# Altium PCB JWB-001.PcbDoc (part 2 of 2)
Units mil, origin at the board's own origin, x right, y up, seen from the top; angles counter-clockwise.
Board outline 944.88 x 944.88 mil, 4 copper layers (Top, Layer 2, Layer 3, Bottom), stack 35.2 mil thick; 81 components, 68 nets, 347 pads, 153 vias.
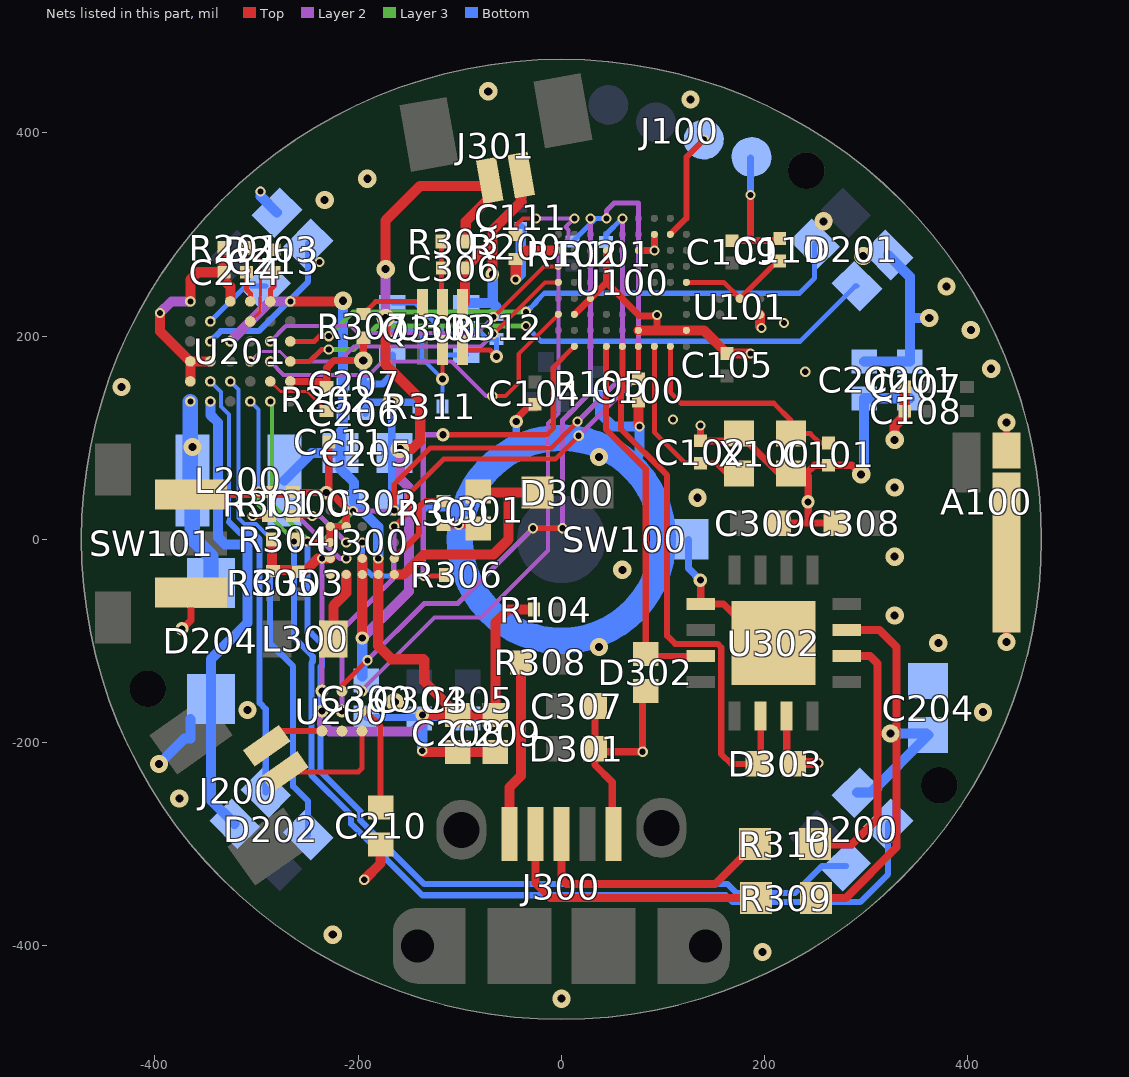
[diagram p4: the nets of this part, all layers, seen from the top]

## Via types
v1: diameter 10, hole 6, Top to Layer 2, tented top, 27 vias
v2: diameter 18, hole 8, Top to Bottom, 26 vias
v3: diameter 10, hole 6, Top to Bottom, 24 vias
v4: diameter 10, hole 6, Top to Bottom, tented both sides, 15 vias
v5: diameter 13, hole 7, Top to Bottom, tented top, 12 vias
v6: diameter 10, hole 6, Layer 3 to Bottom, tented bottom, 8 vias
v7: diameter 13, hole 7, Top to Layer 2, tented top, 7 vias
v8: diameter 18, hole 8, Top to Layer 2, 5 vias
v9: diameter 10, hole 6, Top to Layer 2, 5 vias
v10: diameter 18, hole 8, Top to Bottom, tented top, 5 vias
v11: diameter 10, hole 6, Top to Bottom, tented top, 4 vias
v12: diameter 10, hole 6, Layer 3 to Bottom, 3 vias
v13: diameter 18, hole 8, Layer 3 to Bottom, 3 vias
v14: diameter 10, hole 6, Layer 2 to Layer 3, 3 vias
v15: diameter 18, hole 8, Top to Layer 2, tented top, 2 vias
v16: diameter 28, hole 16, Top to Bottom, 1 vias
v17: diameter 10, hole 6, Top to Bottom, tented bottom, 1 vias
v18: diameter 10/10 (per signal layer), hole 6, Layer 3 to Bottom, tented bottom, 1 vias
v19: diameter 13, hole 7, Layer 3 to Bottom, 1 vias

## Nets (pads, with @x,y where several pads share a name; then routed paths per layer and width w, separated by ;. In a path a pad name is that pad's centre, name@x,y a point inside that pad or via, vN(x,y) a via of type N, cw(c..) or ccw(c..) an arc to the next point about the centre after c; other vN are vias at no path point) (continued)
GND: A100.2 A100.3 C100.2 C101.2 C102.2 C104.2 C105.2 C107.2 C108.2 C109.2 C110.2 C111.2 C200.2 C201.2 C204.2 C205.2 C206.2 C207.2 C208.2 C209.2 C210.2 C211.2 C213.2 C214.1 C300.2 C301.2 C302.2 C304.2 C305.2 C307.2 C308.2 C309.2 D301.2 D302.1 D303.2 J100.4 J300.5 Q300.1 R105.1 R200.1 R201.1 R202.1 R300.1 R301.1 R304.1 R307.1 R311.1 RT300.2 SW100.2 SW101.1 U100.B1 U100.B4 U100.C8 U100.D7 U100.G3 U100.G4 U100.G6 U100.G9 U100.H3 U101.B1 U200.B3 U201.A5 U201.D1 U201.E4 U201.F1 U201.F4 U201.F5 U300.A2 U300.B1 U300.B2 U300.C1 U300.E1 U302.3 U302.13 U302.17 X100.2 X100.4 | length 3053
  Top w7: v5@-373,-88 -364.57,-79.57 SW101.1@-364.57,-52.23 ; SW101.1@-364.57,44.23 -266.58,44.23 -264.81,46 v5(-231.41,46) v5@-231,46 ; U201.A5@-266.79,155.47 R202.1@-236.66,155.47 ; R304.1@-258.19,-3 U300.C1@-227.5,-3 U300.B1@-227.5,12.75 U300.B2@-211.75,12.75 U300.A2@-211.75,28.5 -211.75,30.7 -229.02,47.98 C211.2@-229.02,96 ; R202.1@-231,149.81 -231,169 -224,176 v10(-195,176) R307.1@-195,198.19 ; R300.1@-116,14.19 C301.2@-85.3,14.19 ; v5@-44,116 -44,119 -30.02,132.98 C104.2@-26,132.98 ; U100.C8@12.76,221.5 U100.D7@28.5,237.25 44.25,253 ; D301.2@33.11,-209 33.11,-222.11 50,-239 J300.5@50,-288.56 ; D301.2@33.11,-206 33.11,-170 C307.2@36.11,-167 ; D301.2@36.11,-209 v3(80,-209) 80,-152.11 D302.1@83,-149.11 ; U100.G6@44.25,284.5 44.25,253 ; U100.G4@75.75,284.5 v4(91.5,284.5) U100.H3@91.5,300.24 ; 94,205.76 v11@94,220 ; v11(94,221) v11@94,220 ; v3(137,112) C102.2@137,97.02 X100.2@167.7,97.02 ; v5@137.15,-40.15 U302.13@137.15,-63.61 159.61,-63.61 198,-102 U302.17@209,-102 ; C109.2@168,294.02 186,294.02 ; X100.2@174.78,104.09 X100.4@214.15,64.72 ; v3(186,339) 186,294.02 ; C110.2@213,294.02 186,294.02 ; C309.2@214.11,16 243,16 ; U302.3@221.8,-173.85 221.8,-213.68 D303.2@229.11,-221 ; X100.4@225.96,64.72 240.72,64.72 248.98,72.98 C101.2@263,72.98 286.02,72.98 v2(295,64) ; 243,62.45 243,16 ; C308.2@269.89,16 243,16 ; v2(438,-101) 438.29,-100.71 A100.2@438.29,-13.11 ; A100.3@438,87.57 v2(438,115) ; 44.25,253 44.25,252.75 77,220 v11@94,220
  Top w10: v3(-395,223) -395,204.94 U201.F4@-365.21,175.16 ; U201.F5@-365.21,155.47 U201.F4@-365.21,175.16 ; v9(-365.21,234.21) -365.21,255.79 -358,263 C214.1@-332.02,263 ; U201.E4@-345.53,175.16 U201.F4@-365.21,175.16 ; R201.1@-332.02,286.4 C214.1@-332.02,263 ; U201.D1@-325.84,234.21 -325.84,248.84 -332.02,255.02 C214.1@-332.02,263 ; v3(-194,-335) -178,-319 C210.2@-178,-300.11 ; v3(-137,-208) -135.89,-209.11 C208.2@-102,-209.11 C209.2@-65,-209.11 ; v3(-45,255.81) -45,274 -34.5,284.5 U100.G9@-2.99,284.5 ; U100.B4@75.75,205.76 94,205.76 U100.B1@122.99,205.76 140.24,205.76 C105.2@163,183 v3(186,183) ; v3@76,112 C100.2@76,135.98 ; v3@195.37,209.63 U101.B1@195.37,221.25 ; D303.2@230.11,-220 v17(253,-220) ; v2(328,98) 328,112 337.98,121.98 C108.2@337.98,126.19 C107.2@337.98,150.19
  Layer 2 w10: v3(-395,223) -383.79,234.21 v9(-365.21,234.21)
  Bottom w7: C207.2@-195,155 v10(-195,176) ; C206.2@-192.98,124 C207.2@-193,153 -176,153 -166.42,162.58 Q300.1@-166.42,181.41 ; C300.2@-192,-175.11 C305.2@-93,-175.11 ; -190.98,135 v10(-167,135) ; R311.1@-140.81,131 -144.81,135 v10(-167,135) ; -95.06,31.04 -162.93,31.04 C302.2@-167.89,36 -167,36.89 v10(-167,135) ; -44.41,91.97 v5(-44.41,116) ; SW100.2@125,0 125,-28.41 v5(136.74,-40.15) ; v3(186,339) J100.4@186,375.23
  Bottom w10: v3(-137,-208) C304.2@-137,-179.11 ; v3(-45,255.81) -39.99,260.82 C111.2@-39.99,306.22 ; R105.1@38,141.19 38,124 51,111 v3(77,111) 77,84.43 66.9,74.33 ; v2(295,64) 298,67 C200.2@298,138.89 C201.2@343,138.89
  other v2: 0,-452 198,-406 -225,-389 -376,-255 415,-170 -164,-160 37,-106 371,-102 328,-75 60,-30 328,-17 134,41 328,51 37,81 -433,150 423,168 403,206 379,249 -233,334 -191,355 127,433 -72,441
  other v3: 110,118 240,165 197,208 219,213
  other v5: -373.41,-88 242.59,37
  other v8: -309,-168 -363,91 297,279 258,313
  other v9: -101,14.19 -238,273
GREEN1: D200.3 U201.B6 | length 964.5
  Layer 3 w4: v4@-285,134.31 -285,35 -250,0 v6(-250,-2)
  Bottom w6: -250,-92.27 v6(-250,-2) ; -246,-92.27 -235.76,-102.51 -235.76,-123.94 -237,-125.18 -237,-228.54 -198,-267.54 -198,-276.27 -134.91,-339.36 163.64,-339.36 172.27,-348 230,-348 256.38,-321.62 D200.3@279.87,-321.62
  other v4: -286.47,135.79
GREEN2: D201.3 U201.A3 | length 576.1
  Top w5: U201.A3@-266.79,194.84 -243.16,194.84 -238,200 v4(-229,200)
  Layer 3 w5: v4(-229,200) -205,224 v6(-35,224)
  Bottom w5: v6(-35,224) -31.5,227.5 -30.65,227.5 -24.5,233.65 -24.5,234.5 -16.76,242.24 234.24,242.24 249.24,257.24 D201.3@249.24,291
GREEN3: D202.3 U201.D5 | length 484.8
  Bottom w4: v4(-325.84,155.47) -318,147.63 -318,21 -312,15 -300.69,15 -287,1.31 -287,0
  Bottom w6: -287,0 -287,-102 -264,-125 -264,-243 -249.24,-257.76 D202.3@-249.24,-291
GREEN4: D203.3 U201.E2 | length 68.9
  Bottom w5: v3(-345.53,214.53) -310.81,249.24 D203.3@-291,249.24
HAP_EN: R200.2 U100.J8 U200.A1 | length 649.7
  Top w4: R200.2@-44,300.81 -44,310 -38.01,315.99 v1(-25,315.99)
  Layer 2 w4: v1(-196.31,-149.31) -196.31,-148.31 -125,-77 -79,-77 -13,-11 -13,114 -3,124 -3,286.09 7.01,296.1 7.01,304.39 4.08,307.31 v1(12.76,315.99) v1(-25,315.99)
HAP_TRIG: U100.J7 U200.B1 | length 597.6
  Top w5: U200.B1@-216,-144 v1(-191,-119) ; v1(-28,11) v1(1,11)
  Layer 2 w5: v1(-191,-119) -135,-63 -102,-63 v1(-28,11) ; v1(1,11) 1,117 28.5,144.5 v1(28.5,315.99)
LRA+: J200.1 U200.A3 | length 113.8
  Top w5: J200.1@-271.97,-228.9 -199.9,-228.9 -196.31,-225.31 U200.A3@-196.31,-188.68
LRA-: J200.2 U200.C3 | length 60.3
  Top w6: J200.2@-290.03,-203.1 -275.62,-188.68 U200.C3@-235.68,-188.68
NetC100_1: C100.1 U100.A4 | length 31.7
  Top w5: C100.1@76,158.02 U100.A4@76,189.76
NetC101_1: C101.1 U100.A2 X100.1 | length 229.2
  Top w5: U100.A2@107.24,190.01 107.24,144.76 118,134 209,134 225.96,117.04 X100.1@225.96,104.09 244.91,104.09 253.98,95.02 C101.1@263,95.02
NetC102_1: C102.1 U100.A3 X100.3 | length 172.2
  Top w5: U100.A3@91.5,190.01 91.5,105.5 122.02,74.98 C102.1@137,74.98 152.02,74.98 X100.3@162.28,64.72
NetC110_1: C110.1 U100.E1 U101.A2 | length 111.6
  Top w5: U100.E1@122.99,253 159.68,253 U101.A2@175.68,237 C110.1@212.66,273.98
NetC210_1: C210.1 U200.A2 | length 104.4
  Top w6: U200.A2@-196.31,-169 -193,-169 -178,-184 C210.1@-178,-263.89
NetC213_1: C213.1 U201.B1 | length 30.2
  Top w5: U201.B1@-286.47,234.21 -286.47,245.53 -283,249 C213.1@-283,262.95
NetC214_2: C214.2 U201.C1 | length 30.4
  Top w5: C214.2@-309.98,263 -309.98,245.98 -306.16,242.16 U201.C1@-306.16,234.21
NetC301_1: C301.1 D300.C U300.E5 | length 230.1
  Top w10: U300.E5@-164.5,-34.5 -155.25,-34.5 -135.76,-15 -67,-15 -52.21,-0.21 -52.21,46 ; C301.1@-80.89,46 -52.21,46 ; D300.C@-23.53,46 -52.21,46
NetC303_2: C303.2 R304.2 R305.1 U300.D1 | length 92.2
  Top w10: R304.2@-284.81,0 -284.81,-30.19 -251.19,-30.19 -239.75,-18.75 U300.D1@-227.5,-18.75
NetC306_1: C306.1 R303.1 U301.5 | length 60.6
  Top w5: U301.5@-117.81,232.45 R303.1@-117.81,293
NetD204_A: D204.A L200.2 U201.F6 | length 184.3
  Bottom w15: L200.2@-365.21,59.94 v4(-365.21,135.79) ; L200.2@-363.28,58 -363.28,1.28 -345,-17 D204.A@-345,-42.91
NetJ100_3: J100.3 U100.H2 | length 106.8
  Top w6: U100.H2@107.24,300.24 123,316 123,376.31 v3(140.14,393.45)
NetJ300_1: J300.1 R308.1 | length 173.5
  Top w10: J300.1@-51.18,-289.74 -51.18,-244.18 -39.7,-232.7 R308.1@-39.7,-121
NetJ300_2: J300.2 R309.1 | length 271.8
  Top w8: J300.2@-25.59,-289.74 -25.59,-338.41 -11,-353 R309.1@191.47,-353
NetJ300_3: J300.3 R310.1 | length 253
  Top w8: J300.3@0,-289.74 0,-334 5,-339 151.47,-339 R310.1@190.47,-300
NetL300_1: L300.1 U300.E2 | length 68.8
  Top w10: L300.1@-224.44,-98 -224.44,-65.44 -211.75,-52.75 U300.E2@-211.75,-34.5
NetQ300_2: Q300.2 R311.2 U301.2 | length 138.4
  Top w4: v5(-117,158) U301.2@-117,186.36
  Bottom w4: Q300.2@-166.42,207 -143,207 -137,201 -137,178 v5(-117,158) R311.2@-117,131.19
NetQ300_3: Q300.3 Q300.6 | length 106.3
  Bottom w5: Q300.3@-166.42,232.59 -143.59,232.59 -118,207 -118,186 -113.41,181.41 Q300.6@-93.58,181.41
NetQ300_5: Q300.5 R312.2 U301.3 | length 86.8
  Top w5: U301.3@-97.32,186.36 -70.36,186.36 v5(-64,180)
  Bottom w5: Q300.5@-93.58,207 -83,207 -73.19,197.19 R312.2@-64,197.19 v5(-64,180)
NetR201_2: R201.2 U201.C2 | length 81.9
  Top w3: R201.2@-309,287 -296,274 -296,253 -296.5,224.69 -296.5,224.19 U201.C2@-306.16,214.53
NetR202_2: R202.2 U201.B5 | length 67.6
  Top w3: U201.B5@-286.47,155.47 -276.5,145.5 -250.31,145.5 R202.2@-231,126.19
NetR300_2: R300.2 U300.D5 | length 87.3
  Top w6: U300.D5@-164.5,-18.75 -140,5.76 -140,32 -134.19,37.81 R300.2@-116,37.81
NetR301_2: R301.2 U300.D2 | length 125.2
  Top w5: v1(-303.81,23.19) R301.2@-288,23.19
  Layer 2 w5: v1(-303.81,23.19) -260.04,23.19 -218.1,-18.75 v1(-211.75,-18.75)
NetR307_2: R307.2 U301.6 | length 64.3
  Top w5: R307.2@-195,221.81 -182.81,234 -139.05,234 U301.6@-136.69,231.64
NetR309_2: R309.2 U302.7 | length 353.3
  Top w8: R309.2@250.53,-353 280,-353 330,-303 330,-106 313.2,-89.2 U302.7@280.85,-89.2
NetR310_2: R310.2 U302.6 | length 258
  Top w8: R310.2@249.53,-300 286,-300 311,-275 311,-122 303.8,-114.8 U302.6@280.85,-114.8
NetRT300_1: RT300.1 U300.C2 | length 63.1
  Top w5: RT300.1@-264,23.19 v1(-245.19,23.19)
  Layer 2 w5: v1(-245.19,23.19) -237.94,23.19 v1(-211.75,-3)
PMIC_INT: R306.1 U100.A8 U300.C3 | length 465
  Top w5: v11(-135,-36) R306.1@-115.81,-36 ; v7@-116,103 -14,103 -8,109 -8,169.25 U100.A8@12.76,190.01
  Layer 2 w5: v11@-136,-35 -136,103 v7(-116.41,103)
  Bottom w5: v11(-196,-3) -196,-26 -186,-36 v11(-135,-36)
RED1: D200.4 U201.C6 | length 1079.4
  Layer 3 w4: v6(-298,47) -298,34 -272,8 -271.86,8 -263,-0.86 v6(-263,-2)
  Bottom w4: v4(-306.16,135.79) -298,127.63 v6(-298,47)
  Bottom w6: v6(-263,-2) -263,-97 -244.76,-115.24 -244.76,-120.21 -246,-121.46 -246,-232.27 -207,-271.27 -207,-280 -136.77,-350.23 161.77,-350.23 168.54,-357 294,-357 321.62,-329.38 D200.4@321.62,-279.86
RED2: D201.4 U201.A4 | length 600.9
  Top w5: U201.A4@-266.79,175.16 -247.84,175.16 -236,187 v4(-229,187)
  Layer 3 w5: v4(-229,187) -204.51,187 -181.51,210 v18(-35,210)
  Bottom w5: v18(-35,210) -20,195 235,195 289.24,249.24 D201.4@291,249.24
RED3: D202.4 U201.E5 | length 434.9
  Bottom w4: v4(-345.53,155.47) -335,144.94 -335,131 -327,123 -327,17
  Bottom w6: -327,17 -316,6 -303,6 -297,0 -297,-161 -291,-167 D202.4@-291,-249.24
RED4: D203.4 U201.E3 | length 157.9
  Bottom w6: v3(-345.53,194.84) -335.37,205 -298,205 -249.24,253.76 D203.4@-249.24,291
SCL: R101.1 U100.J5 U200.C1 U300.A5 | length 710
  Top w5: v1(-164.5,28.5) -164.5,54.5 -129,90 -10,90 v1(16,116)
  Layer 2 w5: v7(-235.68,-149.31) v14(-235.68,-18.68) ; v14(-205,28) v1@-165,28 ; v1(16,116) 60,160 v4(60,315.99)
  Layer 3 w5: v14(-235.68,-18.68) -235.68,-2.68 v14(-205,28)
  Bottom w5: R101.1@44,292.81 44,299.99 v4(60,315.99)
SCLK: U100.F9 U201.B3 | length 319.9
  Top w4: v1(-67,219) -17.25,268.75 U100.F9@-2.99,268.75
  Layer 2 w4: v1(-286.47,194.84) -271.31,210 -207,210 -200,203 -83,203 v1(-67,219)
SDA: R102.1 U100.J6 U200.B2 U300.B5 | length 770.2
  Top w5: v1(-164.5,12.75) -150,27.25 -150,45 -116,79 -6,79 v1(17,102)
  Layer 2 w5: v7(-216,-169) -216,-89 -165,-38 v1@-165,12.75 ; v1(17,102) 76,161 76,331 52,331 44.25,323.25 v4(44.25,315.99)
  Bottom w5: R102.1@11,293 33.99,315.99 v4(44.25,315.99)
SDI: U100.C9 U201.B4 | length 358.4
  Top w4: v1(-68,141) -55,141 -42,154 -42,182.5 U100.C9@-2.99,221.5
  Layer 2 w4: v1(-286.47,175.16) -273.31,162 -189.2,162 -176.2,175 -108,175 -74,141 v1(-68,141)
SDO: U100.E9 U201.C4 | length 343.7
  Top w4: v1(-67,202) -16,253 U100.E9@-2.99,253
  Layer 2 w3: v1(-306.16,175.16) -296.32,185 -277,185 -267,175
  Layer 2 w4: -267,175 -219,175 -204,190 -79,190 v1(-67,202)
USB_UART_RX: D303.1 U100.A5 U302.2 | length 548.9
  Top w6: 58.85,145.85 58.85,108.15 104,63 104,-95 111.89,-102.89 153.81,-102.89 157.32,-106.4 157.32,-211.32 167,-221 D303.1@192.89,-221 ; 60,147 U100.A5@60,190.01 ; D303.1@196.2,-217.69 U302.2@196.2,-173.85
USB_UART_TX: D302.2 U100.A6 U302.15 | length 371
  Top w6: U100.A6@44,189.76 44,108 83,69 D302.2@83,-112.89 ; D302.2@84.91,-114.8 U302.15@137.15,-114.8
VB-: C306.2 J301.2 Q300.4 R312.1 U301.4 | length 240.2
  Top w10: U301.4@-94.98,233.98 C306.2@-94.98,267 -67.79,294.19 ; v5@-67.79,261.21 -67.79,294.19 ; J301.2@-39.49,358.73 -39.49,332.51 -67.79,304.21 -67.79,294.19
  Bottom w10: Q300.4@-93.58,232.59 -67.59,232.59 ; v5@-67.59,261 -67.59,232.59 ; -64,229 -67.59,232.59
  other v5: -68,261
VBATT: C300.1 J301.1 R303.2 U300.D3 U300.E3 | length 755.3
  Top w10: v5(-196,-97) U300.E3@-196,-34.5 U300.D3@-196,-18.75 ; v15(-173,218) -173,172 -139,138 -139,97 -147,89 v8(-159,89) ; v15(-173,266) -173,314 -139.08,347.92 J301.1@-75.85,347.92 ; R303.2@-94.19,293 -94.19,312.81 -70.51,336.49 J301.1@-70.51,347.92
  Layer 2 w10: v5(-196,-97) -150,-51 -150,51 -159,60 v8(-159,89) ; v15(-173,218) v15(-173,266)
  Bottom w10: C300.1@-196,-134.89 v5(-196,-97)
VLED: C200.1 C201.1 C204.1 D200.1 D201.1 D202.1 D203.1 D204.C U201.E6 | length 863
  Bottom w10: v13(-396,-221) -371,-196 -365,-196 D204.C@-365,-177.09 ; v4(-345.53,135.79) -345.53,122.53 -338,115 -338,2 -331,-5 -309,-5 -309,-82 -345,-118 D204.C@-345,-157.09 -345,-256.49 D202.1@-321.62,-279.87 ; v12(-296,342.5) -296,337.76 D203.1@-279.87,321.62 ; D200.1@291,-249.24 304.33,-249.24 C204.1@361,-192.57 ; C200.1@298,175.11 C201.1@343,175.11 343,217 ; D201.1@321.62,279.87 343,258.49 343,217 ; v13(324,-191) C204.1@359.43,-191 ; v13(362,218) 344,218 343,217
VSYS: C205.1 C206.1 C207.1 C208.1 C209.1 C302.1 L200.1 R104.2 U200.C2 U201.A1 U201.D3 U300.D4 U300.E4 | length 998.9
  Top w10: v9(-266.79,234.21) v10@-215.79,234.21 ; v11(-180.25,-18.75) U300.E4@-180.25,-34.5 -180.25,-104.75 -167,-118 -136,-118 -135,-119 -135,-140 -134.95,-139.95 C208.1@-102,-172.89 ; v7(-136.89,-172.89) C208.1@-102,-172.89 ; R104.2@-27,-69 -52,-69 -65,-82 C209.1@-65,-172.89 C208.1@-102,-172.89
  Layer 2 w10: v9(-325.84,194.84) -286.47,234.21 v9(-266.79,234.21) ; v7(-235.68,-169) -235.68,-181.32 -228,-189 -146,-189 -136.89,-179.89 v7(-136.89,-172.89)
  Bottom w10: L200.1@-272.72,58 -245.72,85 C205.1@-217.57,85 ; C207.1@-215.05,153 v10(-215.05,234.95) ; C207.1@-215.05,153 -215,108 -217.57,105.43 C205.1@-217.57,85 ; v11(-180.25,-18.75) -180.25,12.14 C302.1@-204.11,36 -204.11,56.11 -217.57,69.57 C205.1@-217.57,85
pads on no net: J200.0 J300.4 J300.6 J301.0 SW101.0 U100.B5 U100.B6 U100.B7 U100.B9 U100.C5 U100.C6 U100.C7 U100.D8 U100.E2 U100.E3 U100.E7 U100.E8 U100.F2 U100.F3 U100.F7 U100.F8 U100.G1 U100.G2 U100.G5 U100.G7 U100.G8 U100.H1 U100.H4 U100.H5 U100.H6 U100.H7 U100.J3 U100.J4 U201.D2 U201.D4 U201.F2 U300.A1 U300.A3 U300.A4 U300.B3 U300.B4 U300.C5 U301.1 U302.4 U302.5 U302.11 U302.12 U302.14 U302.16

## Polygon pours and split planes (outlines as drawn)
VLED on Layer 3 "L3-VLED" (solid, remove dead copper, pour order 12): 363,-4.22 363,235 349,249 201,397 -42,397 -43,398 -219,398 -220,398 -330,288 -367.53,250.47 -399.8,155.64 -383.25,28.51 -399.96,-186.04 -346,-240 -265.85,-320.15 -161.28,-351.38 -159.66,-351.04 139.09,-350.96 202,-364 353.56,-98 460,-98 485.37,82.37 460,124.01 404.56,257.86 287.6,374.81 281.3,381.11 239.63,408.96 132.42,453.36 38.73,472 -49.45,472 -108.86,460.56 -250.88,403.76 -337.88,320.93 -379.83,269.82 -414.75,217.56 -430,180.74 -454.16,122.41 -458.4,79.4 -456.78,77.78 -456.78,-122.39 -456.78,-205.64 -374.81,-287.6 -195.42,-467 23.63,-467 158,-467 275,-417 574,-118 512,-56 512,55.73 480.35,130.33
1V8 on Layer 3 "L3-1V8" (solid, remove dead copper, pour order 14): 363,108.54 363,230.78 363,234 253,344 201,396 201,397 -219,397 -220,398 -357.99,260.01 -364.7,260.01 -364.7,190.74 -399.8,155.64 -398.86,154.7 -398.86,-171.88 -398.86,-187.14 -265.85,-320.15 -244.67,-341.33 -194.94,-341.33 -169.37,-341.33 -159.66,-351.04 -159.32,-351.38 141.11,-351.38 206.62,-351.38 211,-347 353.56,-204.44 353.56,-98
GND on Layer 2 "L3-GND" (solid, remove dead copper, pour order 18): 461,107 415,218.05 415,262 414,262 254,422 191,485 -17,485 -232,485 -383,334 -485,232 -485,-249 -485,-251 -348,-388 -347,-388 -272,-463 -257,-478 281,-478 281,-455 511,-225 498,-212 498,137 498,150 415,233
GND on Top "Top-GND" (solid, remove dead copper, pour order 20): -540,512 -537,509 506,509 506,-520 510,-524 508,-522 -547,-522
GND on Bottom "Bottom-GND" (solid, remove dead copper, pour order 22): -551,528 565,528 599,494 584,479 584,-503 -548,-503 -551,-506

## Keep-outs
Keep-Out Layer:
  circle w3.94: c0,0 r472.44

## Silkscreen, mask and mechanical layers (free items; w line width, h text height)
Bottom Overlay:
  drawing of 659 lines, arcs and shapes, not listed
  text "v3.7" at 305,-92 h15
Board Outline:
  circle w3.94: c0,0 r472.44
TitleBlock_Top:
  lines w5: -2765,-840 -2565,-840 ; -2765,1285 -2565,1285 ; -2765,3410 -2565,3410 ; -2565,-1565 -2565,-2765 ; -15,-2965 -15,-2765 ; -15,5335 -15,5535 ; 2735,-2965 2735,-2765 ; 2735,5335 2735,5535 ; 3335,-2765 1935,-2765 -2565,-2765 ; 3535,-2465 8035,-2465 ; 3535,-2165 8035,-2165 ; 3535,-1865 5035,-1865 ; 5035,-2765 5035,-2165 5035,-1565 ; 5485,-2965 5485,-2765 ; 5485,5335 5485,5535 ; 7135,-2765 7135,-2165 ; 8035,-840 8235,-840 ; 8035,1285 8235,1285 ; 8035,3410 8235,3410 ; -2565,-2765 8035,-2765 ; -2565,-2765 -2565,5335 8035,5335 8035,-2765 ; 3535,-2765 3535,-1565 ; 3535,-2765 8035,-2765 ; 3535,-2765 2135,-2765 2135,-1565 3535,-1565 ; 3535,-1565 5035,-1565 ; 5035,-1565 8035,-1565 8035,-2765 ; -2765,-2965 -2765,5535 8235,5535 8235,-2965 -2765,-2965
  text "1" at -1413.66,5400 h70
  text "2" at 1337,5400 h70
  text "3" at 4082,5400 h70
  text "4" at 6833.01,5400 h70
  text "A" at -2690,4382 h70
  text "A" at 8110,4382 h70
  text "B" at -2690,2257 h70
  text "B" at 8110,2257 h70
  text "C" at -2690,132 h70
  text "C" at 8110,132 h70
  text "ENGINEER:" at 3585,-1665 h45
  text "TITLE:" at 5085,-1665 h45
  text ".Engineer" at 3985,-1775 h100
  text "PCB DESIGNER:" at 3585,-1960 h45
  text "D" at -2690,-1988 h70
  text "D" at 8110,-1988 h70
  text ".Engineer" at 4010,-2100 h100
  text "DATE:" at 3585,-2265 h45
  text "PART NO.:" at 5085,-2265 h45
  text "REV:" at 7185,-2265 h45
  text ".Company" at 2287,-2371 h70
  text ".PRINT_DATE" at 3635,-2385 h70
  text ".Address1" at 2287,-2471 h70
  text ".Address2" at 2290,-2563 h70
  text "FILE NAME:" at 3585,-2565 h45
  text "DWG NO:" at 5085,-2565 h45
  text "SCALE:" at 7185,-2565 h45
  text ".Address3" at 2285,-2665 h70
  text ".PCB_FILE_NAME_NO_PATH" at 3635,-2685 h70
  text "1" at -1413.66,-2900 h70
  text "2" at 1337,-2900 h70
  text "3" at 4082,-2900 h70
  text "4" at 6833.01,-2900 h70
Drill Drawing:
  drawing of 391 lines, arcs and shapes, not listed
  text "NOTES: UNLESS OTHERWISE SPECIFIED" at 4120,4805 h60
  text "1. MATERIAL: COPPER CLAD PLASTIC SHEET PER IPC-4101" at 4120,4645 h60
  text "ROHS COMPLIANT TG 170 FR-4" at 4280,4525 h60
  text "TYPE GFN FINISHED COPPER WEIGHT TO BE: 1 OZ." at 4280,4405 h60
  text "OVERALL BOARD THICKNESS TO BE .036+/-.005." at 4280,4285 h60
  text "2. UNLESS OTHERWISE SPECIFIED ALL HOLE DIMENSIONS" at 4120,4165 h60
  text "Symbol" at -2263.78,4070 h72
  text "Count" at -1757.9,4070 h72
  text "Hole Size" at -1218.04,4070 h72
  text "Plated" at -118.36,4070 h72
  text "Hole Type" at 387.52,4070 h72
  text "Hole Length" at 1121.32,4070 h72
  text "Routed Path Length" at 2211,4070 h72
  text "APPLY AFTER PLATING." at 4300,4025 h60
  text "1" at -1757.9,3920 h60
  text "16.00mil (0.406mm)" at -1218.04,3920 h60
  text "PTH" at -118.36,3920 h60
  text "Round" at 387.52,3920 h60
  text "-" at 1121.32,3920 h60
  text "-" at 2211,3920 h60
  text "3. ALL HOLES SHALL BE LOCATED WITHIN 0.003 DIAMETER OF" at 4120,3845 h60
  text "2" at -1757.9,3770 h60
  text "32.48mil (0.825mm)" at -1218.04,3770 h60
  text "PTH" at -118.36,3770 h60
  text "Slot" at 387.52,3770 h60
  text "59.06mil (1.500mm)" at 1121.32,3770 h60
  text "26.57mil (0.675mm)" at 2211,3770 h60
  text "TRUE POSITION.  LAYER TO LAYER REGISTRATION SHALL BE" at 4280,3725 h60
  text "2" at -1757.9,3620 h60
  text "35.43mil (0.900mm)" at -1218.04,3620 h60
  text "PTH" at -118.36,3620 h60
  text "Slot" at 387.52,3620 h60
  text "39.37mil (1.000mm)" at 1121.32,3620 h60
  text "3.94mil (0.100mm)" at 2211,3620 h60
  text "WITHIN 0.003.  ADD TEARDROPS AS REQUIRED SO THAT ALL" at 4280,3605 h60
  text "HOLES SURROUNDED BY LAND SHALL HAVE A MINIMUM ANNULAR" at 4280,3485 h60
  text "3" at -1757.9,3470 h60
  text "35.98mil (0.914mm)" at -1218.04,3470 h60
  text "NPTH" at -118.36,3470 h60
  text "Round" at 387.52,3470 h60
  text "-" at 1121.32,3470 h60
  text "-" at 2211,3470 h60
  text "RING OF 0.002." at 4280,3365 h60
  text "12" at -1757.9,3320 h60
  text "7.00mil (0.178mm)" at -1218.04,3320 h60
  text "PTH" at -118.36,3320 h60
  text "Round" at 387.52,3320 h60
  text "-" at 1121.32,3320 h60
  text "-" at 2211,3320 h60
  text "4. CONDUCTOR WIDTHS AND SPACING SHALL BE WITHIN +/- 20%" at 4120,3185 h60
  text "31" at -1757.9,3170 h60
  text "8.00mil (0.203mm)" at -1218.04,3170 h60
  text "PTH" at -118.36,3170 h60
  text "Round" at 387.52,3170 h60
  text "-" at 1121.32,3170 h60
  text "-" at 2211,3170 h60
  text "OF ARTWORK ORIGINALS." at 4280,3065 h60
  text "44" at -1757.9,3020 h60
  text "6.00mil (0.152mm)" at -1218.04,3020 h60
  text "PTH" at -118.36,3020 h60
  text "Round" at 387.52,3020 h60
  text "-" at 1121.32,3020 h60
  text "-" at 2211,3020 h60
  text "5. APPLY SOLDERMASK (LIQUID PHOTO IMAGEABLE) OVER BARE" at 4120,2905 h60
  text "95 Total" at -1757.9,2870 h60
  text "COPPER, SOLDERMASK TO BE PER IPC-SM-840, CLASS T," at 4280,2785 h60
  text "Slot definitions :" at -2263.78,2725.03 h60
  text "Routed Path Length" at -1231.09,2725.03 h60
  text "= Calculated from tool start centre position to tool end centre position." at -128.42,2725.03 h60
  text "COLOR: TRANSPARENT GREEN.  ALL EXPOSED CONDUCTIVE" at 4280,2665 h60
  text "Hole Length" at -1231.09,2625.05 h60
  text "= Routed Path Length + Tool Size = Slot length as defined in the PCB layout" at -538.29,2625.05 h60
  text "SURFACES TO BE IMMERSION GOLD OVER ELECTROLESS NICKEL" at 4280,2545 h60
  text "(ENIG) PER IPC-4552." at 4280,2425 h60
  text "Layer" at -2266.5,2383.5 h60
  text "Name" at -1856.59,2383.5 h60
  text "Material" at -926.84,2383.5 h60
  text "Thickness" at -67.08,2383.5 h60
  text "Constant" at 582.76,2383.5 h60
  text "Board Layer Stack" at 1152.62,2383.5 h60
  text "1" at -2266.5,2263.5 h60
  text "Top Overlay" at -1856.59,2263.5 h60
  text "6. WARP OR TWIST OF BOARD SHALL NOT EXCEED 0.75%." at 4120,2245 h60
  text "2" at -2266.5,2143.5 h60
  text "Top Solder" at -1856.59,2143.5 h60
  text "Solder Resist" at -926.84,2143.5 h60
  text "0.40mil" at -67.08,2143.5 h60
  text "3.5" at 582.76,2143.5 h60
  text "7. APPLY SILKSCREEN, AS REQUIRED, USING WHITE EPOXY INK." at 4120,2085 h60
  text "3" at -2266.5,2023.5 h60
  text "Top" at -1856.59,2023.5 h60
  text "Copper" at -926.84,2023.5 h60
  text "1.40mil" at -67.08,2023.5 h60
  text "8. REMOVE ALL BURRS AND BREAK SHARP EDGES 0.001 MAX." at 4120,1925 h60
  text "4" at -2266.5,1903.5 h60
  text "Core 1" at -1856.59,1903.5 h60
  text "370HR" at -926.84,1903.5 h60
  text "6.00mil" at -67.08,1903.5 h60
  text "4.02" at 582.76,1903.5 h60
  text "9. FABRICATE IN ACCORDANCE WITH IPC-6012, TYPE 2, CLASS 2." at 4120,1785 h60
  text "5" at -2266.5,1783.5 h60
  text "Layer 2" at -1856.59,1783.5 h60
  text "Copper" at -926.84,1783.5 h60
  text "0.70mil" at -67.08,1783.5 h60
  text "6" at -2266.5,1663.5 h60
  text "Core 2" at -1856.59,1663.5 h60
  text "370HR" at -926.84,1663.5 h60
  text "19.00mil" at -67.08,1663.5 h60
  text "4.02" at 582.76,1663.5 h60
  text "10. DIMENSIONS AND TOLERANCES PER ANSI Y14.5." at 4080,1625 h60
  text "7" at -2266.5,1543.5 h60
  text "Layer 3" at -1856.59,1543.5 h60
  text "Copper" at -926.84,1543.5 h60
  text "0.70mil" at -67.08,1543.5 h60
  text "11. SURFACE MOUNT PAD SOLDER PLATING MUST BE FLAT TO A" at 4080,1445 h60
  text "8" at -2266.5,1423.5 h60
  text "Core 3" at -1856.59,1423.5 h60
  text "370HR" at -926.84,1423.5 h60
  text "6.00mil" at -67.08,1423.5 h60
  text "4.02" at 582.76,1423.5 h60
  text "MAXIMUM OF 0.001 ABOVE BOARD SURFACE." at 4300,1305 h60
  text "9" at -2266.5,1303.5 h60
  text "Bottom" at -1856.59,1303.5 h60
  text "Copper" at -926.84,1303.5 h60
  text "1.40mil" at -67.08,1303.5 h60
  text "10" at -2266.5,1183.5 h60
  text "Bottom Solder" at -1856.59,1183.5 h60
  text "Solder Resist" at -926.84,1183.5 h60
  text "0.40mil" at -67.08,1183.5 h60
  text "3.5" at 582.76,1183.5 h60
  text "12. ALL COPPER SET BACK MUST BE MAINTAINED WITHIN ARTWORK" at 4080,1145 h60
  text "11" at -2266.5,1063.5 h60
  text "Bottom Overlay" at -1856.59,1063.5 h60
  text "ORIGINALS FROM ANY EDGE OF P.C. BOARD (i.e O.D., I.D," at 4300,1025 h60
  text "NON-PLATED THROUGH HOLES, NON-PLATED RADIUS, GROOVES" at 4300,905 h60
  text "AND SLOTS)." at 4300,765 h60
  text "13. ALL VIAS TO BE TENTED UNLESS EXPLICITLY CLEARED IN GERBERS" at 4080,585 h60
  text "14. DO NOT CHANGE GERBERS WITHOUT WRITTEN APPROVAL" at 4080,405 h60
  text "15. PCB AND ASSEMBLY MUST BE ROHS COMPLIANT" at 4080,245 h60
  text ".PCB_Title" at 5525,-1810 h100
  text "Fab Drawing" at 5795,-2055 h100
  text ".PCB_PartNumber" at 5470,-2380 h100
  text ".PCB_Rev" at 7370,-2405 h100
TitleBlock_Bot:
  lines w5: -2765,-840 -2565,-840 ; -2765,1285 -2565,1285 ; -2765,3410 -2565,3410 ; -2565,-2465 1935,-2465 ; -2565,-2165 1935,-2165 ; -2565,-1565 435,-1565 ; -1665,-2765 -1665,-2165 ; -15,-2965 -15,-2765 ; -15,5335 -15,5535 ; 435,-2765 435,-2165 435,-1565 ; 435,-1865 1935,-1865 ; 1935,-2765 1935,-1565 ; 2735,-2965 2735,-2765 ; 2735,5335 2735,5535 ; 3335,-2765 3335,-1565 1935,-1565 ; 5485,-2965 5485,-2765 ; 5485,5335 5485,5535 ; 8035,-840 8235,-840 ; 8035,1285 8235,1285 ; 8035,3410 8235,3410 ; 435,-1565 1935,-1565 ; -2765,-2965 -2765,5535 8235,5535 8235,-2965 -2765,-2965 ; -2565,-2765 -2565,5335 8035,5335 8035,-2765 -2565,-2765
  text "4" at -1363.01,5400 h70
  text "3" at 1388,5400 h70
  text "2" at 4133,5400 h70
  text "1" at 6883.66,5400 h70
  text "ASSEMBLY NOTES (UNLESS SPECIFIED OTHERWISE)" at 7660,4385 h100
  text "A" at -2640,4382 h70
  text "A" at 8160,4382 h70
  text "1. ALL PARTS FLUSH TO PCB" at 7660,4185 h100
  text "2. TRIM LEADS TO <=0.100\"" at 7670,4000 h100
  text "B" at -2640,2257 h70
  text "B" at 8160,2257 h70
  text "C" at -2640,132 h70
  text "C" at 8160,132 h70
  text "TITLE:" at 385,-1665 h45
  text "ENGINEER:" at 1885,-1665 h45
  text ".PCB_Title" at -310,-1760 h100
  text ".ENGINEER" at 1415,-1770 h100
  text "PCB DESIGNER:" at 1885,-1960 h45
  text "D" at -2640,-1988 h70
  text "D" at 8160,-1988 h70
  text "BOTTOM ASSEMBLY DRAWING" at 55,-2035 h100
  text ".ENGINEER" at 1420,-2095 h100
  text "REV:" at -1715,-2265 h45
  text "PART NO.:" at 385,-2265 h45
  text "DATE:" at 1885,-2265 h45
  text ".PCBA_Rev" at -1885,-2360 h80
  text ".PCBA_PartNumber" at -60,-2365 h80
  text ".Company" at 3186,-2370 h70
  text ".PRINT_DATE" at 1835,-2385 h70
  text ".Address1" at 3186,-2470 h70
  text ".Address2" at 3185,-2564 h70
  text "SCALE:" at -1715,-2565 h45
  text "DWG NO:" at 385,-2565 h45
  text "FILE NAME:" at 1885,-2565 h45
  text ".Address3" at 3185,-2665 h70
  text ".PCB_FILE_NAME_NO_PATH" at 1835,-2685 h70
  text "4" at -1363.01,-2900 h70
  text "3" at 1388,-2900 h70
  text "2" at 4133,-2900 h70
  text "1" at 6883.66,-2900 h70
TopFabNotes:
  text "ASSEMBLY NOTES (UNLESS SPECIFIED OTHERWISE)" at 3445,4820 h100
  text "1. ALL PARTS FLUSH TO PCB" at 3470,4570 h100
  text ".PCB_Title" at 5525,-1810 h100
  text "Assembly Drawing" at 5570,-2055 h100
  text ".PCBA_PartNumber" at 5470,-2380 h100
  text ".PCBA_Rev" at 7370,-2405 h100

## Dimensions
0,-472.44 to -13,475 on Drill Drawing